# Altium PCB placaInverter.PcbDoc
Units mil, origin at the board's own origin, x right, y up, seen from the top; angles counter-clockwise.
Board outline 6000 x 4000 mil, 2 copper layers (Top Layer, Bottom Layer); 45 components, 29 nets, 157 pads, 0 vias.
Unrouted connection lines stored in the file: 104.
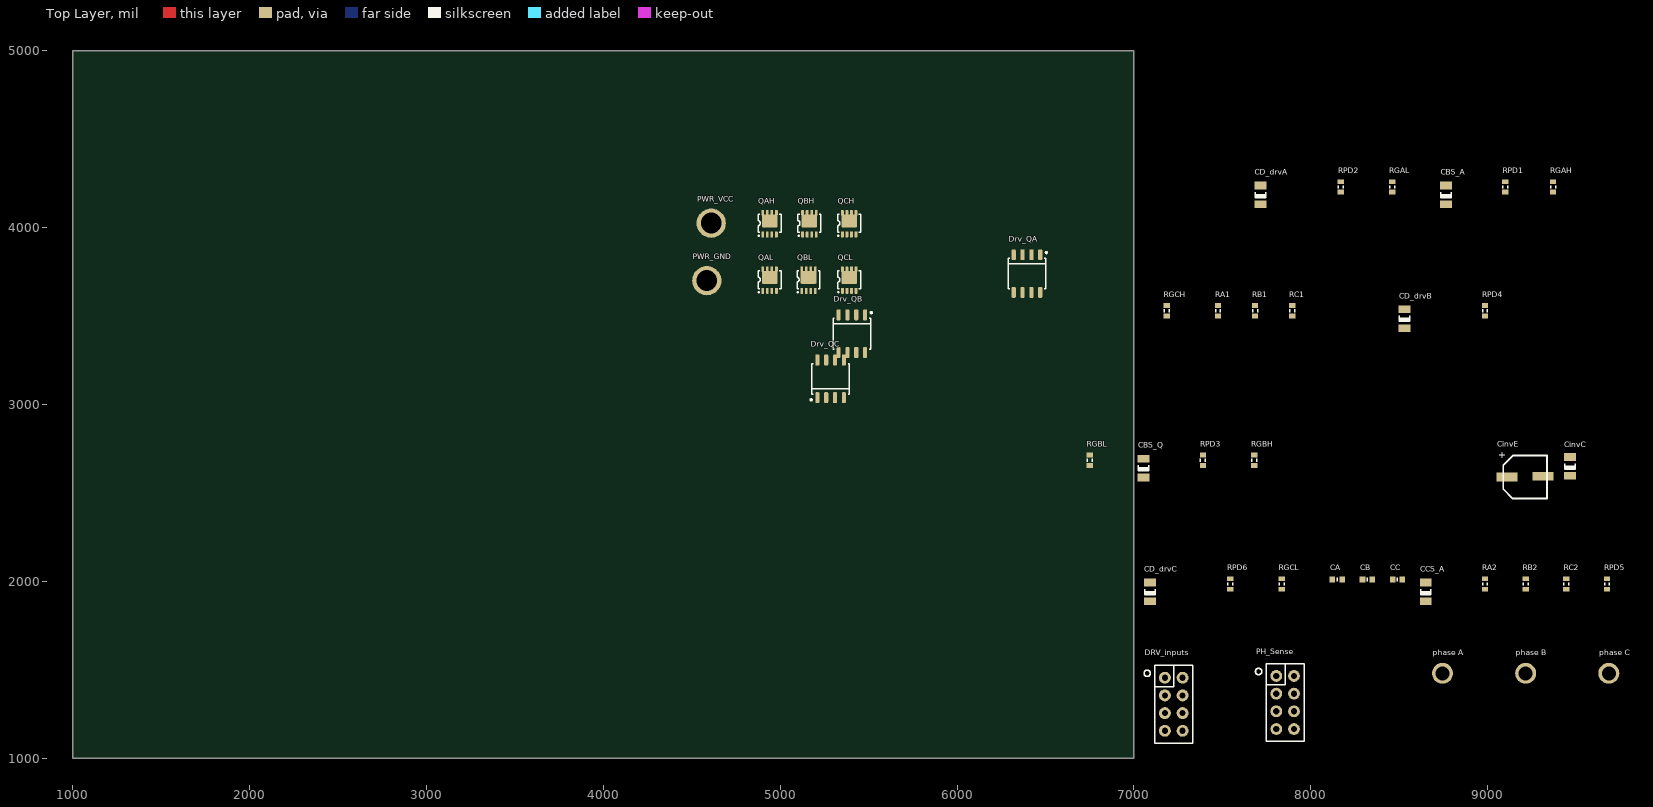
[diagram p0: Top Layer view]
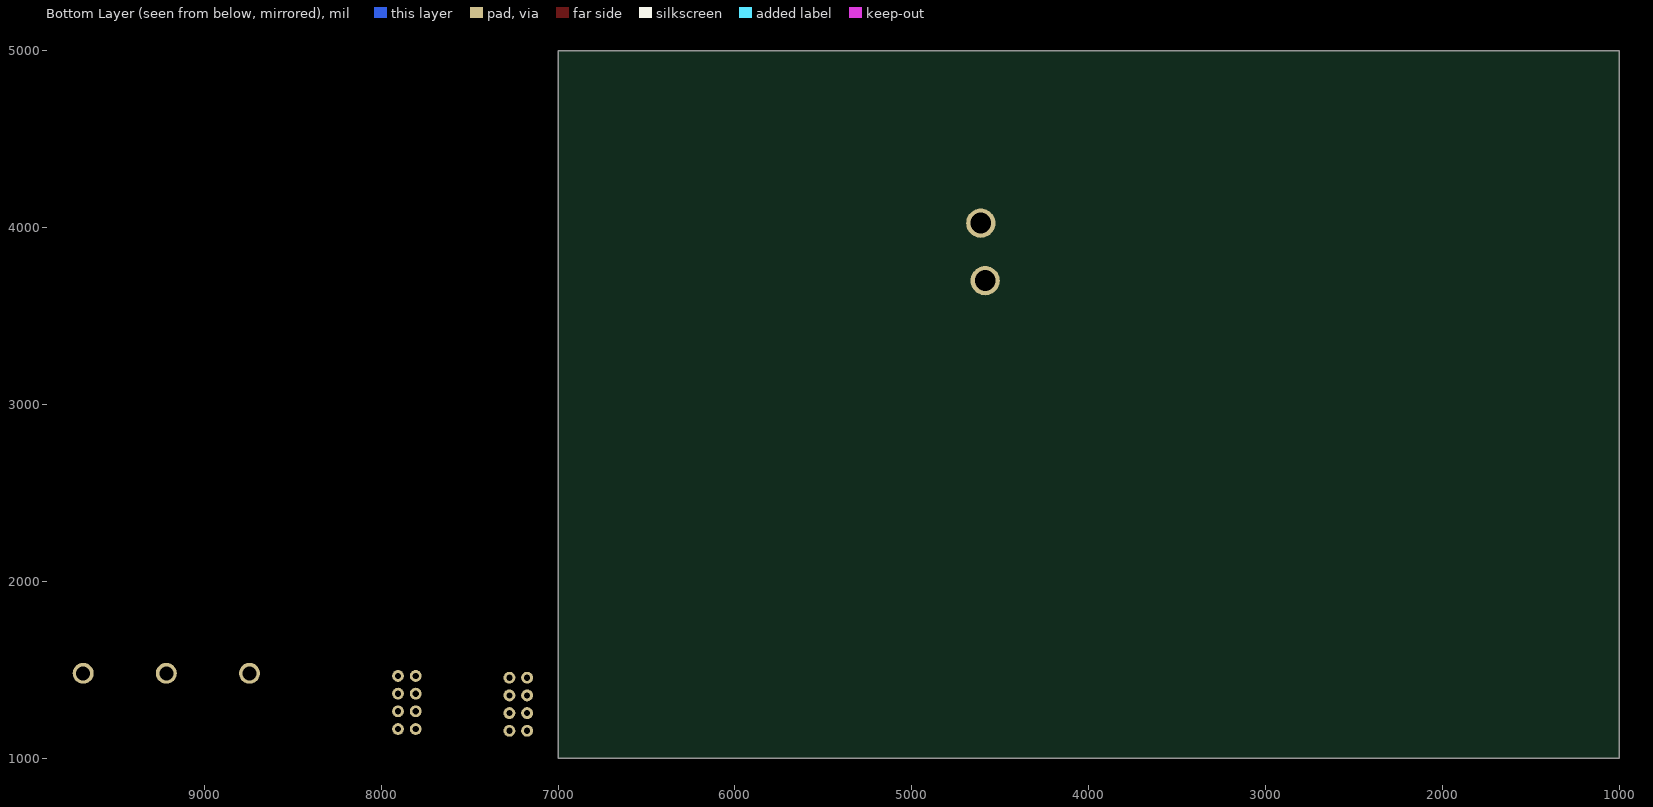
[diagram p1: Bottom Layer view, seen from below]

## Layer stack, top to bottom
Top Layer: signal copper 1.4
Dielectric: dielectric 12.6, FR-4, Dk 4.8
Bottom Layer: signal copper 1.4

## Board outline
1000,1000 7000,1000 7000,5000 1000,5000

## Design rules (kind name [scope] priority, off if disabled: settings)
Clearance [All] p1: gap=10
PolygonConnect [All] p1: connectstyle=Relief reliefconductorwidth=10 reliefentries=4 polygonreliefangle="90 Angle"
RoutingVias [All] p1: holewidth=28 width=50 viastyle="Through Hole" minholewidth=28 minwidth=50 maxholewidth=28 maxwidth=50
SilkscreenOverComponentPads [All] p1: minsilkscreentomaskgap=10
SolderMaskExpansion [All] p1: expansion=4
Width [All] p1: maxlimit=10 minlimit=10 preferedwidth=10
27 further rules are at their usual default settings.

## Classes and differential pairs
component class inv_schem: CA CB CBS_A CBS_Q CC CCS_A CD_drvA CD_drvB CD_drvC CinvC CinvE Drv_QB Drv_QC QAH QAL QBH QBL QCH QCL RA1 RA2 RB1 RB2 RC1 RC2 RGAH RGAL RGBH RGBL RGCH RGCL RPD1 RPD2 RPD3 RPD4 RPD5 RPD6
component class Connectors: DRV_inputs PH_Sense "phase A" "phase B" "phase C" PWR_GND PWR_VCC

## Components (designator, comment, footprint, x,y, rotation, side; value= is the part's Value field where it differs from the comment)
CA "10nF" CAPC1608L 8150,2010 r0 top
CB "10nF" CAPC1608L 8320,2010 r0 top
CBS_A "10uF" CAPC3216L 8765,4185 r90 top
CBS_Q "10uF" CAPC3216L 7055,2640 r90 top
CC "10nF" CAPC1608L 8490,2010 r0 top
CCS_A "10uF" CAPC3216L 8650,1940 r90 top
CD_drvA "10uF" CAPC3216L 7715,4185 r90 top
CD_drvB "10uF" CAPC3216L 8530,3485 r90 top
CD_drvC "10uF" CAPC3216L 7090,1940 r90 top
CinvC "10uF" CAPC3216L 9465,2650 r90 top
CinvE "SMD_ECap" "SMD ECap" 9135,2640 r0 top
DRV_inputs "HEADER-4x2S" G-HEADER_4x2I.1P_TH 7225,1305 r0 top
Drv_QA "LM5101" JEDEC_MS-012AA 6395,3740 r270 top
Drv_QB "LM5101" JEDEC_MS-012AA 5405,3400 r270 top
Drv_QC "LM5101" JEDEC_MS-012AA 5285,3145 r90 top
PH_Sense "HEADER-4x2S" G-HEADER_4x2I.1P_TH 7855,1315 r0 top
"phase A" "SolderedWire_2mm" 2MM_PAD 8745,1480 r90 top
"phase B" "SolderedWire_2mm" 2MM_PAD 9215,1480 r90 top
"phase C" "SolderedWire_2mm" 2MM_PAD 9685,1480 r90 top
PWR_GND "SolderedWire_3mm" 3MM_PAD 4585,3699.94 r90 top
PWR_VCC "SolderedWire_3mm" 3MM_PAD 4610,4025 r90 top
QAH "ManufacturerPartNumber" x-NXP_LFPAK33 4940,4025 r90 top
QAL "ManufacturerPartNumber" x-NXP_LFPAK33 4940,3705.91 r90 top
QBH "ManufacturerPartNumber" x-NXP_LFPAK33 5165,4025 r90 top
QBL "ManufacturerPartNumber" x-NXP_LFPAK33 5160,3705.91 r90 top
QCH "ManufacturerPartNumber" x-NXP_LFPAK33 5390,4025 r90 top
QCL "ManufacturerPartNumber" x-NXP_LFPAK33 5390,3705.91 r90 top
RA1 "3K3" RESC1608L 7475,3530 r90 top
RA2 "1K" RESC1608L 8985,1985 r90 top
RB1 "3K3" RESC1608L 7685,3530 r90 top
RB2 "1K" RESC1608L 9215,1985 r90 top
RC1 "3K3" RESC1608L 7895,3530 r90 top
RC2 "1K" RESC1608L 9445,1985 r90 top
RGAH "0" RESC1608L 9370,4230 r90 top
RGAL "0" RESC1608L 8460,4230 r90 top
RGBH "0" RESC1608L 7680,2685 r90 top
RGBL "0" RESC1608L 6750,2685 r90 top
RGCH "0" RESC1608L 7185,3530 r90 top
RGCL "0" RESC1608L 7835,1985 r90 top
RPD1 "10K" RESC1608L 9100,4230 r90 top
RPD2 "10K" RESC1608L 8170,4230 r90 top
RPD3 "10K" RESC1608L 7390,2685 r90 top
RPD4 "10K" RESC1608L 8985,3530 r90 top
RPD5 "10K" RESC1608L 9675,1985 r90 top
RPD6 "10K" RESC1608L 7545,1985 r90 top

## Footprints (in the part's own frame and the unit in brackets; to place one, negate y for a bottom-side part, rotate by r counter-clockwise, add the part's x,y. Pads: shape width x height; smd on the part's side, far side on the other; paste and mask are expansions set on the pad)
2MM_PAD [mm]
  round 3 hole 2: 0(0,0)
3MM_PAD [mm]
  round 4.2 hole 3: 0(0,0)
CAPC1608L [mm] "Chip Capacitor, Body 1.6x0.8mm, IPC High Density"
  rect 0.8x0.9 smd: 1(-0.7,0) 2(0.7,0)
  silkscreen extent 0,-0.25 0,0.25, body extent -0.87,-0.48 0.87,0.48, height 0.85
CAPC3216L [mm] "Chip Capacitor, Body 3.2x1.6mm, IPC High Density"
  rect 1.1x1.7 smd: 1(-1.35,0) 2(1.35,0)
  silkscreen extent -0.4,-0.75 0.4,0.75, body extent -1.7,-0.9 1.7,0.9, height 1.35
G-HEADER_4x2I.1P_TH [mm] "Header 4x2, 100 mil Pitch, Non polarized"
  round 1.7 hole 0.9: 1(-1.27,3.81) 2(1.27,3.81) 3(-1.27,1.27) 4(1.27,1.27) 5(-1.27,-1.27) 6(1.27,-1.27) 7(-1.27,-3.81) 8(1.27,-3.81)
  silkscreen extent -4.27,-5.59 2.72,5.59, body extent -2.72,-5.59 2.72,5.59, height 8.5
JEDEC_MS-012AA [mm] "SOP, 8-Leads, Body 4x5mm, Pitch 1.27mm, IPC High Density"
  rrect50% 1.55x0.6 smd: 1(-2.7,1.905) 2(-2.7,0.635) 3(-2.7,-0.635) 4(-2.7,-1.905) 5(2.7,-1.905) 6(2.7,-0.635) 7(2.7,0.635) 8(2.7,1.905)
  silkscreen extent -3.15,-2.7 2.2,2.93, body extent -1.95,-2.45 1.95,2.45, height 1.75
RESC1608L [mm] "Chip Resistor, Body 1.6x0.8mm, IPC High Density"
  rect 0.7x0.9 smd: 1(-0.75,0) 2(0.75,0)
  silkscreen extent -0.2,-0.35 0.2,0.35, body extent -0.85,-0.48 0.85,0.48, height 0.6
"SMD ECap" [mm]
  rect 3x1.3 smd: 1(-0.65,-1.25)
  rect 3x1.2 smd: 2(4.5,-1.175)
  silkscreen extent -1.2,-4.38 5.07,1.83
x-NXP_LFPAK33 [mm] "Plastic single ended surface mounted package (LFPAK33); 5 Terminals"
  rrect30% 0.83x0.4 smd paste-2 mask+0.05: 1(-1.615,0.975) 2(-1.615,0.325) 3(-1.615,-0.325) 4(-1.615,-0.975)
  rrect14% 1.85x2.25 smd paste-2 mask+0.05: 5(0.325,0)
  rrect30% 0.75x0.4 smd paste-2 mask+0.05: 5(1.495,-0.975) 5(1.495,-0.325) 5(1.495,0.325) 5(1.495,0.975)
  silkscreen extent -1.87,-1.65 1.3,1.65, body extent -1.3,-1.65 1.3,1.65, height 0.9

## Part data
CA CB CC: library part CAP_100n_0603_50V_Y5V, "CAP CER 0.1UF 50V Y5V 0603"
CBS_A CBS_Q CCS_A CD_drvA CD_drvB CD_drvC CinvC: library part CAP_10u_1206_25V_Y5V, "CAP CER 10UF 25V Y5V 1206"
CinvE: "100uF"
DRV_inputs PH_Sense: library part HEADER_4x2_100mil_F, "CONN HEADER FMAL 8PS .1\" DL GOLD"
Drv_QA Drv_QB Drv_QC: "100V 2A N-Channel MOSFET Gate Driver"
"phase A" "phase B" "phase C": library part SOLDERED_WIRE_2mm, "Pad to solder wire"
PWR_GND PWR_VCC: library part SOLDERED_WIRE_3mm, "Pad to solder wire"
QAH QAL QBH QBL QCH QCL: library part PSMN9R0-25MLC, "TRANSISTOR MOSFET N-CHANN 25V 8.6MOHM"
RA1 RA2 RB1 RB2 RC1 RC2: library part RES_1K_0603_0W1_1%, "RES 1K OHM 1/10W 5% 0603"
RGAH RGAL RGBH RGBL RGCH RGCL: library part RES_0_0603_0W1_1%, "RES 0.0 OHM 1/10W JUMP 0603"
RPD1 RPD2 RPD3 RPD4 RPD5 RPD6: library part RES_10K_0603_0W1_1%, "RES 10K OHM 1/10W 5% 0603"

## Nets (pads, with @x,y where several pads share a name; then routed paths per layer and width w, separated by ;. In a path a pad name is that pad's centre, name@x,y a point inside that pad or via, vN(x,y) a via of type N, cw(c..) or ccw(c..) an arc to the next point about the centre after c; other vN are vias at no path point)
DRVA_H: DRV_inputs.3 Drv_QA.5 RPD1.1
DRVA_L: DRV_inputs.5 Drv_QA.6 RPD2.1
DRVB_H: DRV_inputs.7 Drv_QB.5 RPD3.1
DRVB_L: DRV_inputs.4 Drv_QB.6 RPD4.1
DRVC_H: DRV_inputs.6 Drv_QC.5 RPD5.1
DRVC_L: DRV_inputs.8 Drv_QC.6 RPD6.1
GND: CA.2 CB.2 CC.2 CD_drvA.2 CD_drvB.2 CD_drvC.2 CinvC.2 CinvE.2 DRV_inputs.1 DRV_inputs.2 Drv_QA.7 Drv_QB.7 Drv_QC.7 PH_Sense.7 PH_Sense.8 PWR_GND.0 QAL.1 QAL.2 QAL.3 QBL.1 QBL.2 QBL.3 QCL.1 QCL.2 QCL.3 RA2.2 RB2.2 RC2.2 RPD1.2 RPD2.2 RPD3.2 RPD4.2 RPD5.2 RPD6.2
NetCBS_A_1: CBS_A.1 Drv_QA.2
NetCBS_Q_1: CBS_Q.1 Drv_QB.2
NetCCS_A_1: CCS_A.1 Drv_QC.2
NetDrv_QA_3: Drv_QA.3 RGAH.2
NetDrv_QA_8: Drv_QA.8 RGAL.2
NetDrv_QB_3: Drv_QB.3 RGBH.2
NetDrv_QB_8: Drv_QB.8 RGBL.2
NetDrv_QC_3: Drv_QC.3 RGCH.2
NetDrv_QC_8: Drv_QC.8 RGCL.2
PHASE_A: CA.1 PH_Sense.1 PH_Sense.2 RA1.2 RA2.1
PHASE_B: CB.1 PH_Sense.3 PH_Sense.4 RB1.2 RB2.1
PHASE_C: CC.1 PH_Sense.5 PH_Sense.6 RC1.2 RC2.1
PWR_VCC: CD_drvA.1 CD_drvB.1 CD_drvC.1 CinvC.1 CinvE.1 Drv_QA.1 Drv_QB.1 Drv_QC.1 PWR_VCC.0 QAH.5 QBH.5 QCH.5
QA_OUT: "phase A.0" CBS_A.2 Drv_QA.4 QAH.1 QAH.2 QAH.3 QAL.5 RA1.1
QAH_IN: QAH.4 RGAH.1
QAL_IN: QAL.4 RGAL.1
QB_OUT: "phase B.0" CBS_Q.2 Drv_QB.4 QBH.1 QBH.2 QBH.3 QBL.5 RB1.1
QBH_IN: QBH.4 RGBH.1
QBL_IN: QBL.4 RGBL.1
QC_OUT: "phase C.0" CCS_A.2 Drv_QC.4 QCH.1 QCH.2 QCH.3 QCL.5 RC1.1
QCH_IN: QCH.4 RGCH.1
QCL_IN: QCL.4 RGCL.1

## Text inside footprints (layer, text, board x,y; h text height)
CinvE: Top Overlay "+" at 9060.2,2695.12 h39.37